# Altium PCB PCB_Kick-Starter-Medibox-copy_2024-09-29.pcbdoc
Units mm, origin at the board's own origin, x right, y up, seen from the top; angles counter-clockwise.
Board outline 104.2 x 98.93 mm, 2 copper layers (Top Layer, Bottom Layer); 34 components, 26 nets, 134 pads, 0 vias.
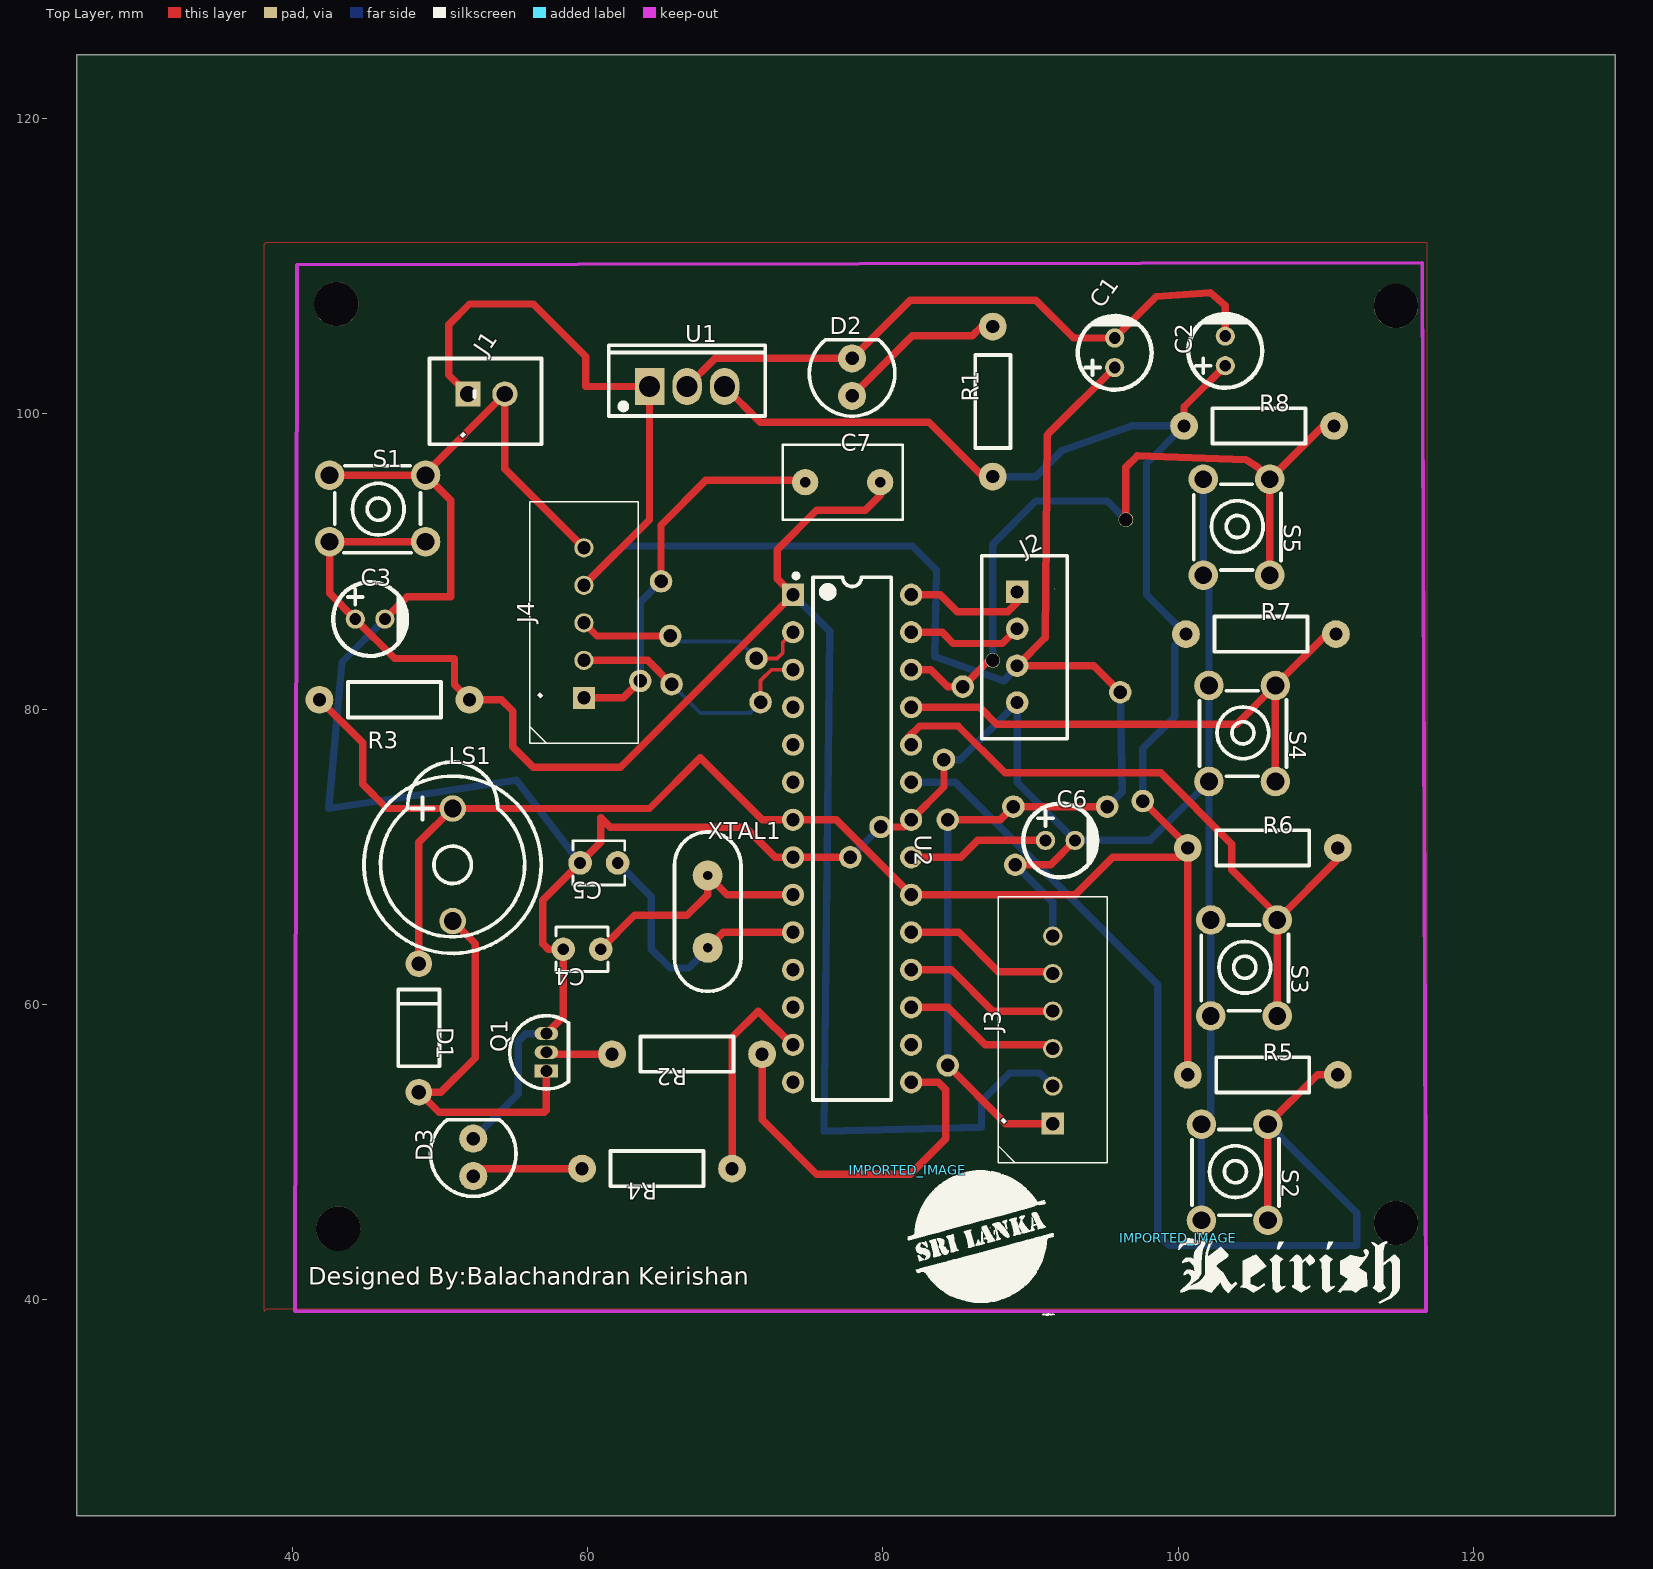
[diagram p0: Top Layer view]
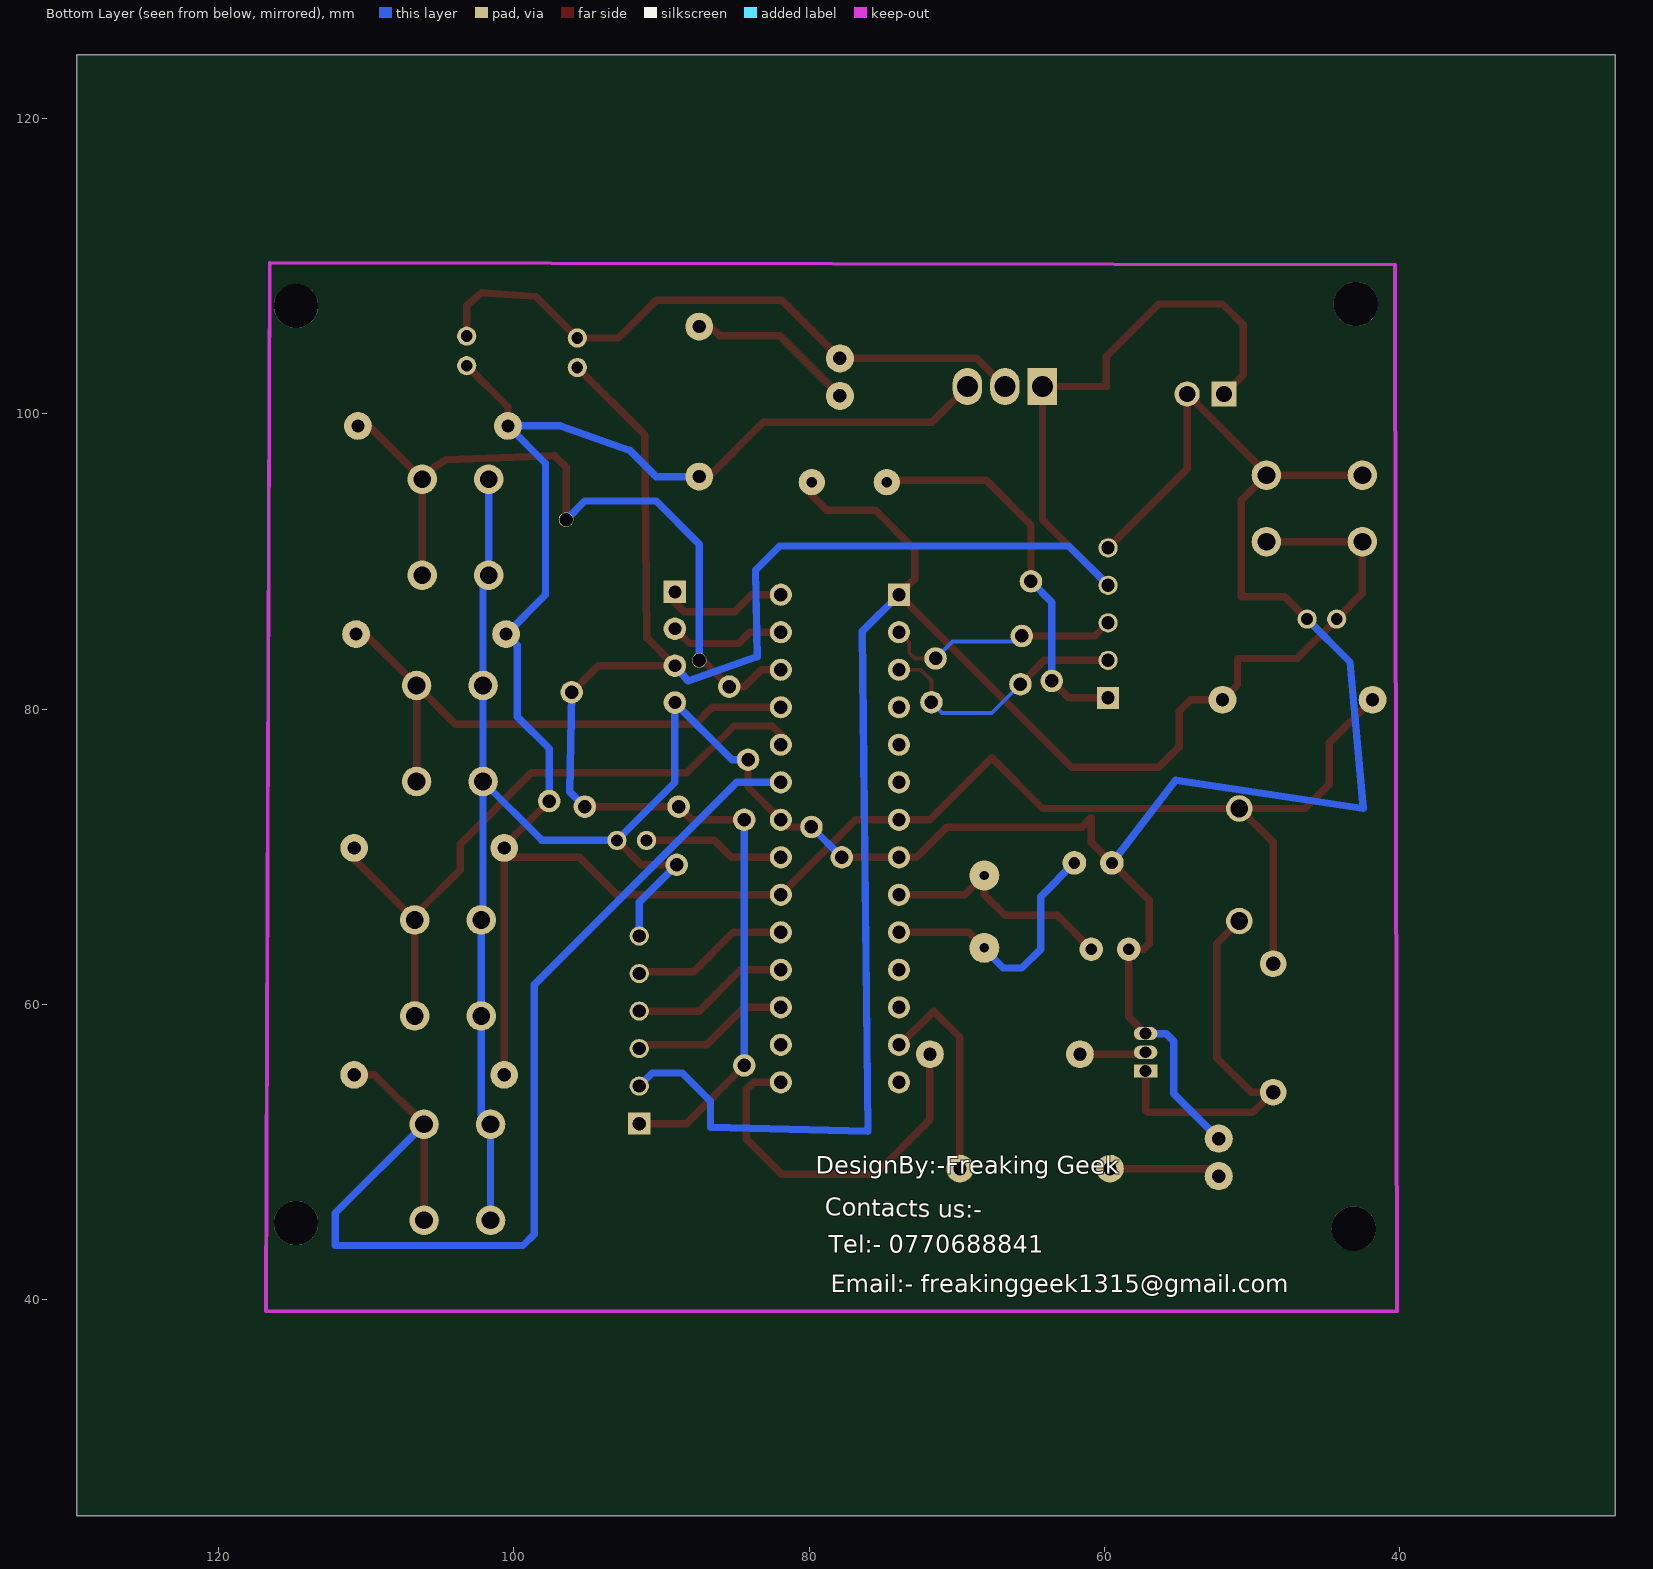
[diagram p1: Bottom Layer view, seen from below]

## Layer stack, top to bottom
Top Layer: signal copper (thickness not stored)
Dielectric: dielectric 0.32, FR-4, Dk 4.8
Bottom Layer: signal copper (thickness not stored)

## Board outline
129.603,25.4 25.4,25.4 25.4,124.333 129.603,124.333

## Components (designator, comment, footprint, x,y, rotation, side; value= is the part's Value field where it differs from the comment)
C1 "0.33uF" CAP-TH_BD5.0-P2.00-D0.8-FD 95.694,104.14 r90 top
C2 "0.1uF" CAP-TH_BD5.0-P2.00-D0.8-FD 103.188,104.267 r90 top
C3 "0.1uF" CAP-TH_BD5.0-P2.00-D0.8-FD 45.276,86.106 r0 top
C4 "22pF" CAP-TH_L3.5-W3.0-P2.54-D0.8 59.627,63.754 r180 top
C5 "22pF" CAP-TH_L3.5-W3.0-P2.54-D0.8 60.77,69.596 r180 top
C6 "0.1uF" CAP-TH_BD5.0-P2.00-D0.8-FD 92.011,71.12 r0 top
C7 "100nF" RAD-0.2 77.279,95.377 r0 top
D1 "1N4001" DO-41_BD2.4-L4.7-P8.70-D0.9-RD 48.578,58.42 r270 top
D2 "LED" "5MM LED" 77.915,101.219 r90 top
D3 "LED" "5MM LED" 52.261,48.387 r90 top
IMPORTED_IMAGE "IMPORTED_IMAGE" IMPORTED_IMAGE 99.995,44.176 r0 top
IMPORTED_IMAGE "IMPORTED_IMAGE" IMPORTED_IMAGE 81.682,48.768 r0 top
J1 "JST_2 PIN" CONN-TH_XHB-2A 53.149,101.346 r180 top
J2 "JST_4 PIN" JST_XH_4_PIN_TOP_ENTRY 89.09,84.201 r0 top
J3 "JST_6  PIN" "JST 2.54MM MALE 6 PIN CONNECTOR_N" 91.504,58.293 r90 top
J4 "JST_5 PIN" "JST 2.54MM MALE 5 PIN CONNECTOR" 59.753,85.852 r90 top
LS1 "BUZZER" DIP-BUZZER-12X6 50.863,69.469 r0 top
Q1 "BC547" TO-92-3_L4.9-W3.7-P1.27-L 57.213,56.769 r90 top
R1 "330Ω" AXIAL-0.4 87.439,100.838 r90 top
R2 "220Ω" AXIAL-0.4 66.739,56.642 r180 top
R3 "10K" AXIAL-0.4 46.926,80.645 r180 top
R4 "330Ω" AXIAL-0.4 64.706,48.895 r180 top
R5 "4.7K" AXIAL-0.4 105.727,55.245 r0 top
R6 "4.7K" AXIAL-0.4 105.727,70.612 r0 top
R7 "4.7K" AXIAL-0.4 105.6,85.09 r0 top
R8 "4.7K" AXIAL-0.4 105.474,99.187 r0 top
S1 "Push_Button" KEY-TH_4P-L6.0-W6.0-P4.50 45.783,93.599 r180 top
S2 "Push_Button" KEY-TH_4P-L6.0-W6.0-P4.50 103.822,48.641 r270 top
S3 "Push_Button" KEY-TH_4P-L6.0-W6.0-P4.50 104.457,62.484 r270 top
S4 "Push_Button" KEY-TH_4P-L6.0-W6.0-P4.50 104.331,78.359 r270 top
S5 "Push_Button" KEY-TH_4P-L6.0-W6.0-P4.50 103.95,92.329 r270 top
U1 "LM7805" TO-220-3_L10.0-W4.5-P2.54-L 66.739,101.854 r0 top
U2 "ATMEGA _328P-PU" DIP-28_L34.6-W7.3-P2.54-LS10.2-BL 77.915,71.247 r270 top
XTAL1 "16MHz" "16MHZ_OSC [PCB]" 68.135,66.294 r0 top

## Footprints (in the part's own frame and the unit in brackets; to place one, negate y for a bottom-side part, rotate by r counter-clockwise, add the part's x,y. Pads: shape width x height; smd on the part's side, far side on the other; paste and mask are expansions set on the pad)
"5MM LED" [mm]
  round 1.9 hole 0.914 paste+0 mask+0.102: 1(0,0) 2(2.54,0)
  silkscreen extent -1.37,-2.9 3.81,2.9
"16MHZ_OSC [PCB]" [mil]
  round 80 hole 25 paste+0 mask+4: 1(0,96.46) 2(0,-96.46)
  silkscreen extent -88,-212 88,212
AXIAL-0.4 [mil]
  round 74 hole 35.4 paste+0 mask+4: 1(-200,0) 2(200,0)
  silkscreen extent -124,-47 124,47
CAP-TH_BD5.0-P2.00-D0.8-FD [mm]
  round 1.3 hole 0.8 paste+0 mask+0.051: 1(-1,0) 2(1,0)
  silkscreen extent -2.5,-2.5 2.5,2.5
CAP-TH_L3.5-W3.0-P2.54-D0.8 [mm]
  round 1.6 hole 0.8 paste+0 mask+0.051: 1(-1.27,0) 2(1.27,0)
  silkscreen extent -1.75,-1.5 1.75,1.5
CONN-TH_XHB-2A [mm]
  rect 1.7x1.7 hole 1.1 paste+0 mask+0.051: 1(1.251,0)
  round 1.7 hole 1.1 paste+0 mask+0.051: 2(-1.251,0)
  silkscreen extent -3.75,-2.42 3.86,3.4
DIP-28_L34.6-W7.3-P2.54-LS10.2-BL [mm]
  rect 1.5x1.5 hole 0.9 paste+0 mask+0.051: 1(-16.51,-4)
  round 1.5 hole 0.9 paste+0 mask+0.051: 2(-13.97,-4) 3(-11.43,-4) 4(-8.89,-4) 5(-6.35,-4) 6(-3.81,-4) 7(-1.27,-4) 8(1.27,-4) 9(3.81,-4) 10(6.35,-4) 11(8.89,-4) 12(11.43,-4) 13(13.97,-4) 14(16.51,-4) 15(16.51,4) 16(13.97,4) 17(11.43,4) 18(8.89,4) 19(6.35,4) 20(3.81,4) 21(1.27,4) 22(-1.27,4) 23(-3.81,4) 24(-6.35,4) 25(-8.89,4) 26(-11.43,4) 27(-13.97,4) 28(-16.51,4)
  silkscreen extent -17.94,-3.95 17.7,2.65
DIP-BUZZER-12X6 [mm]
  round 1.8 hole 1.2 paste+0 mask+0.102: 1(0,3.81) 2(0,-3.81)
  silkscreen extent -6,-6 6,6.96
DO-41_BD2.4-L4.7-P8.70-D0.9-RD [mm]
  round 1.8 hole 1 paste+0 mask+0.051: 1(-4.35,0) 2(4.35,0)
  silkscreen extent -2.6,-1.4 2.6,1.4
IMPORTED_IMAGE [mm]
  silkscreen extent 0,-4.42 15.01,0
"JST 2.54MM MALE 5 PIN CONNECTOR" [mm]
  rect 1.5x1.5 hole 0.9 paste+0 mask+0.102: 1(-5.08,0)
  round 1.3 hole 0.9 paste+0 mask+0.102: 2(-2.54,0) 3(0,0) 4(2.54,0) 5(5.08,0)
  silkscreen extent -8.17,-3.68 8.21,3.68
"JST 2.54MM MALE 6 PIN CONNECTOR_N" [mm]
  rect 1.5x1.5 hole 0.9 paste+0 mask+0.102: 1(-6.35,0.001)
  round 1.3 hole 0.9 paste+0 mask+0.102: 2(-3.81,0.001) 3(-1.27,0.001) 4(1.27,0.001) 5(3.81,0.001) 6(6.35,0.001)
  silkscreen extent -9.01,-3.68 9.01,3.68
JST_XH_4_PIN_TOP_ENTRY [mil]
  rect 60x60 hole 34.25 paste+0 mask+4: 1(0,147.6)
  round 60 hole 34.25 paste+0 mask+4: 2(0,49.21) 3(0,-49.21) 4(0,-147.64)
  silkscreen extent -94,-244 134,244
KEY-TH_4P-L6.0-W6.0-P4.50 [mm]
  round 2 hole 1.2 paste+0 mask+0.051: 1(-3.25,-2.25) 2(3.25,-2.25) 3(3.25,2.25) 4(-3.25,2.25)
  silkscreen extent -2.9,-2.9 2.9,3
RAD-0.2 [mil]
  round 70 hole 28 paste+0 mask+2: 1(100,0) 2(-100,0)
  silkscreen extent -160,-100 160,100
TO-92-3_L4.9-W3.7-P1.27-L [mm]
  rect 0.9x1.6 hole 0.8 paste+0 mask+0.051: 1(-1.27,0)
  oval 0.9x1.6 hole 0.8 paste+0 mask+0.051: 2(0,0) 3(1.27,0)
  silkscreen extent -2.48,-1.5 2.48,2.48
TO-220-3_L10.0-W4.5-P2.54-L [mm]
  rect 2x2.5 hole 1.4 paste+0 mask+0.051: 1(-2.54,0)
  oval 2x2.5 hole 1.4 paste+0 mask+0.051: 2(0,0) 3(2.54,0)
  silkscreen extent -5.3,-2 5.3,2.8

## Free pads (board coordinates)
  round 1.524 hole 0.914 paste+0.102 mask+0.102: 1(65.687,81.696) 2(71.716,80.478) 3(65.596,84.963) 5(71.438,83.439) 6(63.563,81.915) 7(64.976,88.661) 8(77.787,69.977) 10(79.84,72.029) 11(84.138,76.581) 13(88.963,69.469) 15(84.391,55.88) 16(84.391,72.517) 17(88.837,73.406) 20(97.599,73.787) 22(95.186,73.406) 23(96.075,81.153) 24(85.407,81.534)
  round 1 hole 0.914 paste+0.102 mask+0.102: 26(87.439,83.312) 27(96.456,92.837)
  round 3 hole 3 unplated paste+0: ""(42.989,107.442) ""(43.116,44.831) ""(114.745,45.212) ""(114.745,107.315)

## Nets (pads, with @x,y where several pads share a name; then routed paths per layer and width w, separated by ;. In a path a pad name is that pad's centre, name@x,y a point inside that pad or via, vN(x,y) a via of type N, cw(c..) or ccw(c..) an arc to the next point about the centre after c; other vN are vias at no path point)
5V: C2.1 D1.1 LS1.1 pad.20 R1.1 R3.2 R5.1 R6.1 R7.1 R8.1 U1.3 U2.7 U2.20 | length 170
  Top Layer w0.5: R3.2 44.767,77.724 44.767,74.93 46.419,73.279 LS1.1 ; D1.1 48.578,70.993 LS1.1 ; U1.3 71.691,99.441 83.121,99.441 86.804,95.758 R1.1 ; pad.20 100.647,70.739 R6.1 ; R8.1 100.393,100.473 C2.1 ; R5.1 R6.1 ; LS1.1 64.198,73.279 67.627,76.708 71.819,72.517 U2.7 76.834,72.517 U2.20 93.027,67.437 95.567,69.977 100.013,69.977 R6.1
  Bottom Layer w0.5: R1.1 90.361,95.758 92.138,97.536 96.837,99.187 97.727,99.187 R8.1 97.853,96.647 97.853,87.757 R7.1 99.758,84.328 99.758,79.502 97.599,77.343 pad.20
BTN1: R5.2 S2.3 S2.4 U2.23 | length 76.4
  Top Layer w0.5: S2.3 S2.4 109.427,55.245 R5.2
  Bottom Layer w0.5: U2.23 84.9,75.057 98.615,61.341 98.615,44.45 99.377,43.688 112.078,43.688 112.078,45.886 S2.4
BTN2: R6.2 S3.3 S3.4 U2.24 | length 44.4
  Top Layer w0.5: U2.24@81.724,78.105 82.486,78.867 85.09,78.867 88.265,75.692 98.806,75.692 103.632,70.866 103.632,69.126 S3.4@106.517,66.241 ; S3.3 S3.4 110.807,69.834 R6.2
BTN3: R7.2 S4.3 S4.4 U2.25 | length 38.3
  Top Layer w0.5: U2.25 86.55,80.137 87.694,78.994 103.966,78.994 S4.4 ; S4.3 S4.4 ; R7.2 110.062,85.09 S4.4
BTN4: pad.24 pad.26 pad.27 R8.2 S5.3 S5.4 U2.26 | length 51.8
  Top Layer w0.5: U2.26 83.248,82.677 84.391,81.534 pad.24 87.185,83.312 pad.26 ; pad.27 96.456,96.393 97.218,97.155 104.584,96.901 105.346,96.432 S5.4 ; S5.3 S5.4 ; R8.2 109.808,99.187 S5.4
  Bottom Layer w0.5: pad.26 87.439,91.186 90.361,94.107 95.186,94.107 pad.27
BUZZER: R2.1 U2.15 | length 25.3
  Top Layer w0.5: R2.1 71.819,52.197 75.501,48.514 81.852,48.514 84.264,50.927 84.264,54.229 83.757,54.737 U2.15
GND: C3.2 C4.2 C5.2 C6.2 D3.2 J1.2 J2.4 J3.6 J4.5 pad.8 pad.10 pad.11 pad.13 Q1.3 S1.1 S1.2 S2.1 S2.2 S3.1 S3.2 S4.1 S4.2 S5.1 S5.2 U2.8 U2.22 | length 220.4
  Top Layer w0.5: S1.2 S1.1 ; C3.2 47.799,87.63 50.736,87.63 50.736,94.146 S1.1 ; Q1.3 58.356,59.182 C4.2 57.34,63.754 56.959,64.135 56.959,67.056 C5.2 60.896,70.993 60.896,72.644 61.531,72.009 70.675,72.009 72.707,69.977 U2.8 pad.8 ; J4.5 54.4,96.285 J1.2 49.033,95.979 S1.1 ; pad.10 81.427,72.029 U2.22 84.138,74.74 pad.11 ; pad.13 91.36,69.469 C6.2
  Bottom Layer w0.5: C3.2 43.37,83.2 42.481,73.279 55.181,75.184 C5.2 ; D3.2 55.308,53.975 55.308,57.531 55.816,58.039 Q1.3 ; pad.8 pad.10 ; pad.11 85.221,76.581 J2.4 89.09,75.041 C6.2 98.091,71.12 S4.2 ; pad.13 91.503,66.93 J3.6 ; S2.2 S2.1 102.208,52.526 S3.2 S3.1 102.081,65.861 S4.2 ; S5.1 S5.2 102.081,88.698 S4.1 S4.2
J4_1: C7.2 J4.1 pad.6 pad.7 | length 26.5
  Top Layer w0.5: J4.1 62.42,80.772 pad.6 ; pad.7 64.976,92.471 68.008,95.504 74.612,95.504 C7.2
  Bottom Layer w0.5: pad.6 63.563,87.249 pad.7
LS1_2: D1.2 LS1.2 Q1.1 | length 26.6
  Top Layer w0.5: LS1.2 52.387,64.135 52.387,56.388 50.069,54.07 D1.2 49.942,52.705 57.087,52.705 57.213,52.832 Q1.1
MISO: J3.4 U2.18 | length 10.7
  Top Layer w0.5: U2.18 84.645,62.357 87.439,59.563 J3.4
MOSI: J3.3 U2.17 | length 10.7
  Top Layer w0.5: U2.17 84.391,59.817 86.931,57.277 91.249,57.277 J3.3
Q1_2: Q1.2 R2.2 | length 4.5
  Top Layer w0.5: Q1.2 57.34,56.642 R2.2
R1_2: D2.1 R1.2 | length 11.5
  Top Layer w0.5: D2.1 81.978,105.283 86.042,105.283 86.677,105.918 R1.2
R4_2: D3.1 R4.2 | length 7.6
  Top Layer w0.5: D3.1 52.768,48.895 R4.2
RESET: C3.1 C7.1 J3.2 R3.1 S1.3 S1.4 U2.1 | length 122.2
  Top Layer w0.5: S1.4 S1.3 42.534,87.848 C3.1 46.943,83.439 50.99,83.439 50.99,81.661 R3.1 54.165,80.645 54.927,79.883 54.927,77.47 56.325,76.073 62.231,76.073 U2.1 72.834,88.837 72.834,90.805 75.501,93.472 78.803,93.472 79.819,94.488 C7.1
  Bottom Layer w0.5: U2.1 76.391,85.281 76.01,51.435 86.677,51.689 86.677,53.467 88.582,55.372 90.614,55.372 J3.2
RX: J4.3 pad.3 pad.5 U2.2 | length 16.4
  Top Layer w0.254: pad.5 72.834,83.439 73.215,83.82 73.215,84.518 U2.2
  Top Layer w0.5: J4.3 60.642,84.963 pad.3
  Bottom Layer w0.254: pad.3 65.596,84.836 65.849,84.582 70.294,84.582 pad.5
SCK: J3.5 U2.19 | length 10.7
  Top Layer w0.5: U2.19 85.153,64.897 87.82,62.23 91.376,62.23 J3.5
SCL: J2.1 U2.28 | length 8.6
  Top Layer w0.5: U2.28 83.883,87.757 85.026,86.614 88.456,86.614 89.09,87.249 J2.1
SDA: J2.2 U2.27 | length 7.9
  Top Layer w0.5: U2.27 84.01,85.217 84.772,84.455 88.095,84.455 J2.2
TX: J4.2 pad.1 pad.2 U2.3 | length 17.7
  Top Layer w0.254: pad.2 71.716,81.939 72.453,82.677 U2.3
  Top Layer w0.5: J4.2 64.072,83.312 pad.1
  Bottom Layer w0.254: pad.1 67.627,79.756 70.994,79.756 pad.2
U1_2: C1.2 C2.2 D2.2 U1.2 | length 43.5
  Top Layer w0.5: U1.2 68.644,103.759 D2.2 81.852,107.696 90.361,107.696 92.917,105.14 C1.2 98.505,107.95 102.171,108.204 103.188,107.315 C2.2
U2_9: C4.1 U2.9 XTAL1.1 | length 16.4
  Top Layer w0.5: C4.1 63.182,66.04 66.739,66.04 68.135,67.437 XTAL1.1 69.443,67.437 U2.9
U2_10: C5.1 U2.10 XTAL1.2 | length 18
  Top Layer w0.5: XTAL1.2 69.189,64.897 U2.10
  Bottom Layer w0.5: C5.1 64.325,67.31 64.325,63.754 65.596,62.484 66.865,62.484 68.135,63.754 XTAL1.2
U2_13: R4.1 U2.13 | length 14.7
  Top Layer w0.5: R4.1 69.787,57.785 71.564,59.563 73.85,57.277 U2.13
U2_21: C6.1 U2.21 | length 9.6
  Top Layer w0.5: U2.21 85.281,69.977 86.423,71.12 C6.1
VCC: C1.1 J1.1 J2.3 J3.1 J4.4 pad.15 pad.16 pad.17 pad.22 pad.23 U1.1 | length 151.4
  Top Layer w0.5: J1.1 50.609,102.634 50.609,106.045 52.006,107.442 56.325,107.442 59.88,103.886 59.88,101.854 U1.1 64.198,92.837 J4.4 ; pad.15 88.328,51.943 J3.1 ; pad.16 87.947,72.517 pad.17 pad.22 ; C1.1 91.233,98.679 91.123,98.552 90.995,84.856 J2.3 94.277,82.951 pad.23
  Bottom Layer w0.5: J4.4 62.42,91.059 81.978,91.059 83.629,89.408 83.502,83.566 88.201,81.915 88.943,82.804 J2.3 ; pad.15 pad.16 ; pad.22 96.203,74.422 pad.23
pads on no net: U2.4 U2.5 U2.6 U2.11 U2.12 U2.14 U2.16

## Polygon pours and split planes (outlines as drawn)
GND on Top Layer (solid): 38.354,111.633 116.84,111.633 116.84,39.497 116.713,39.37 38.227,39.37 38.1,39.243 38.1,111.506 38.227,111.633

## Silkscreen, mask and mechanical layers (free items; w line width, h text height)
Top Overlay:
  text "Designed By:Balachandran Keirishan" at 41.084,40.64 h2.03
Bottom Overlay:
  text "DesignBy:-Freaking Geek" at 79.566,48.133 h2.03
  text "Contacts us:-" at 78.93,45.339 h2.03 r1
  text "Tel:- 0770688841" at 78.676,42.799 h2.03
  text "Email:- freakinggeek1315@gmail.com" at 78.549,40.132 h2.03